# Altium PCB DeutschPCB.PcbDoc (part 1 of 2)
Units mil, origin at the board's own origin, x right, y up, seen from the top; angles counter-clockwise.
Board outline 2910 x 1625 mil, 2 copper layers (Top Layer, Bottom Layer), stack 61.8 mil thick; 103 components, 118 nets, 371 pads, 132 vias.
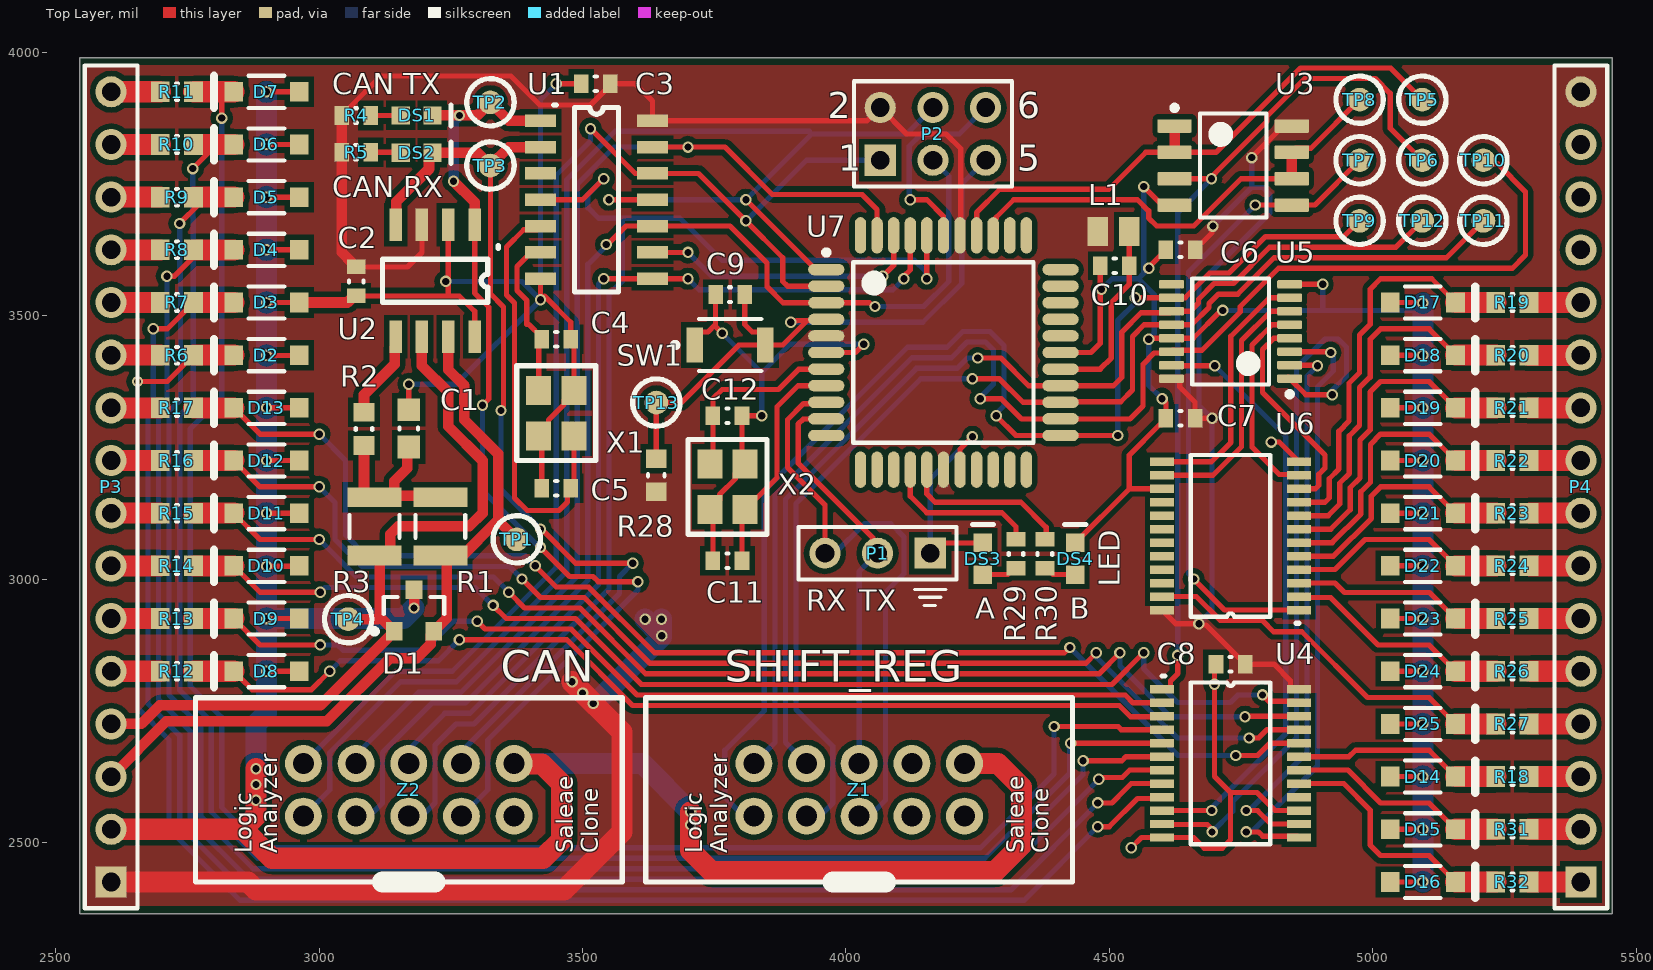
[diagram p0: Top Layer view]
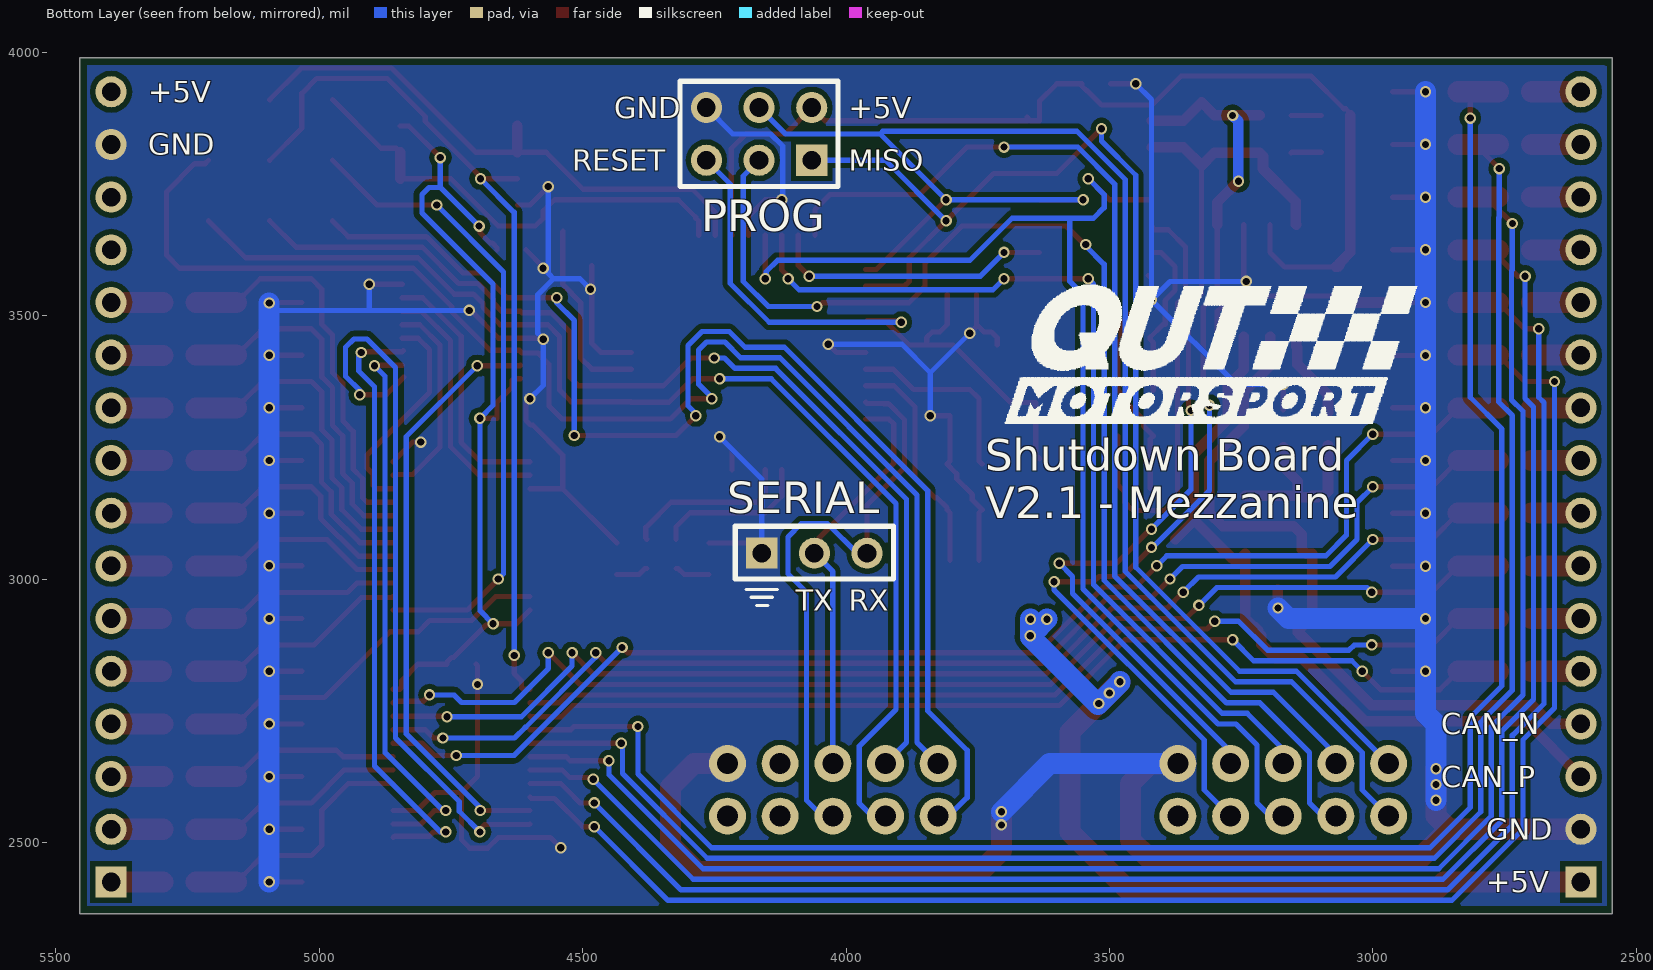
[diagram p1: Bottom Layer view, seen from below]

## Layer stack, top to bottom
Top Solder: solder mask 0.4, Solder Resist, Dk 3.5
Top Layer: signal copper 1.4
Dielectric 1: core 59, Core-043, Dk 4.3
Bottom Layer: signal copper 1.4
Bottom Solder: solder mask 0.4, Solder Resist, Dk 3.5

## Board outline
2545,2365 2545,3990 5455,3990 5455,2365

## Design rules (kind name [scope] priority, off if disabled: settings)
Clearance [All] p1: gap=10 ignorepadtopadclearanceinfootprint=FALSE except(0: Arc-Hole Track-Hole SMDPad-Hole THPad-Hole Via-Hole Fill-Hole Poly-Hole Region-Hole Text-Hole; 6: SMDPad-SMDPad)
PolygonConnect [All] p1: connectstyle=Direct reliefconductorwidth=10 reliefentries=4 polygonreliefangle="90 Angle" airgapwidth=10
RoutingVias [All] p1: holewidth=13.78 width=21.65 viastyle="Through Hole" minholewidth=13.78 minwidth=21.65 maxholewidth=13.78 maxwidth=21.65
SolderMaskExpansion [All] p1: expansion=4
Width [All] p1: maxlimit=40 minlimit=10 preferedwidth=20 minimp=50.000000 maximp=50.000000 favimp=50.000000
30 further rules are at their usual default settings.

## Classes and differential pairs
component class Master: P3 P4
component class MCU: C9 C10 C11 C12 DS3 DS4 L1 P1 P2 R28 R29 R30 SW1 TP9 TP10 TP11 TP12 TP13 U7 X2 Z1 Z2
component class Demux: C6 C7 C8 D2 D3 D4 D5 D6 D7 D8 D9 D10 D11 D12 D13 D14 D15 D16 D17 D18 D19 D20 D21 D22 D23 D24 D25 R6 R7 R8 R9 R10 R11 R12 R13 R14 R15 R16 R17 R18 R19 R20 R21 R22 R23 R24 R25 R26 R27 R31 R32 TP5 TP6 TP7 TP8 U3 U4 U5 U6
component class CANBUS: C1 C2 C3 C4 C5 D1 DS1 DS2 R1 R2 R3 R4 R5 TP1 TP2 TP3 TP4 U1 U2 X1

## Components (designator, comment, footprint, x,y, rotation, side; value= is the part's Value field where it differs from the comment)
C1 "CAP 4.7nF 50V 0603(1608)" CAPC0603(1608)100_M 3170,3285.98 r270 top value=4.7nF
C2 "CAP 100nF 50V 0603(1608)" CAPC0603(1608)100_L 3070,3565 r90 top value=100nF
C3 "CAP 100nF 50V 0603(1608)" CAPC0603(1608)100_L 3525,3940 r0 top value=100nF
C4 "CAP 18pF 50V 0603(1608)" CAPC0603(1608)100_L 3450,3455 r180 top value=18pF
C5 "CAP 18pF 50V 0603(1608)" CAPC0603(1608)100_L 3450,3172.44 r0 top value=18pF
C6 "CAP 100nF 50V 0603(1608)" CAPC0603(1608)100_L 4635,3625 r180 top value=100nF
C7 "CAP 100nF 50V 0603(1608)" CAPC0603(1608)100_L 4635,3305 r0 top value=100nF
C8 "CAP 100nF 50V 0603(1608)" CAPC0603(1608)100_L 4729.92,2838.5 r180 top value=100nF
C9 "CAP 100nF 50V 0603(1608)" CAPC0603(1608)100_L 3780,3540 r180 top value=100nF
C10 "CAP 100nF 50V 0603(1608)" CAPC0603(1608)100_L 4510,3595 r180 top value=100nF
C11 "CAP 18pF 50V 0603(1608)" CAPC0603(1608)100_L 3775,3035 r0 top value=18pF
C12 "CAP 18pF 50V 0603(1608)" CAPC0603(1608)100_L 3775,3310 r180 top value=18pF
D1 "NUP2105LT1G" ONSC-SOT-23-3-318-08_V 3180,2940 r90 top
D2 "BZT52C5V1-7-F" DIOD-SOD123_V 2899.84,3425 r180 top
D3 "BZT52C5V1-7-F" DIOD-SOD123_V 2899.84,3525 r180 top
D4 "BZT52C5V1-7-F" DIOD-SOD123_V 2899.84,3625 r180 top
D5 "BZT52C5V1-7-F" DIOD-SOD123_V 2899.84,3725 r180 top
D6 "BZT52C5V1-7-F" DIOD-SOD123_V 2899.84,3825 r180 top
D7 "BZT52C5V1-7-F" DIOD-SOD123_V 2899.84,3925 r180 top
D8 "BZT52C5V1-7-F" DIOD-SOD123_V 2899.84,2825 r180 top
D9 "BZT52C5V1-7-F" DIOD-SOD123_V 2899.84,2925 r180 top
D10 "BZT52C5V1-7-F" DIOD-SOD123_V 2899.84,3025 r180 top
D11 "BZT52C5V1-7-F" DIOD-SOD123_V 2899.84,3125 r180 top
D12 "BZT52C5V1-7-F" DIOD-SOD123_V 2899.84,3225 r180 top
D13 "BZT52C5V1-7-F" DIOD-SOD123_V 2899.84,3325 r180 top
D14 "BZT52C5V1-7-F" DIOD-SOD123_V 5095,2625 r0 top
D15 "BZT52C5V1-7-F" DIOD-SOD123_V 5095,2525 r0 top
D16 "BZT52C5V1-7-F" DIOD-SOD123_V 5095,2425 r0 top
D17 "BZT52C5V1-7-F" DIOD-SOD123_V 5095,3525 r0 top
D18 "BZT52C5V1-7-F" DIOD-SOD123_V 5095,3425 r0 top
D19 "BZT52C5V1-7-F" DIOD-SOD123_V 5095,3325 r0 top
D20 "BZT52C5V1-7-F" DIOD-SOD123_V 5095,3225 r0 top
D21 "BZT52C5V1-7-F" DIOD-SOD123_V 5095,3125 r0 top
D22 "BZT52C5V1-7-F" DIOD-SOD123_V 5095,3025 r0 top
D23 "BZT52C5V1-7-F" DIOD-SOD123_V 5095,2925 r0 top
D24 "BZT52C5V1-7-F" DIOD-SOD123_V 5095,2825 r0 top
D25 "BZT52C5V1-7-F" DIOD-SOD123_V 5095,2725 r0 top
DS1 "LED Blue 0603" "LED BLUE 0603" 3185,3880 r0 top
DS2 "LED Blue 0603" "LED BLUE 0603" 3185,3809.17 r0 top
DS3 "LED Orange 0603" "LED ORANGE 0603" 4260,3038.54 r90 top
DS4 "LED Orange 0603" "LED ORANGE 0603" 4435,3038.54 r90 top
L1 "LQM21FN100M70L" MURA-IND0805_L 4507.72,3660 r180 top
P1 "Header 3" HDR1X3 4160,3049.09 r180 top
P2 "Header 3X2" HDR2X3 4065,3795 r0 top
P3 "Header 16" HDR1X16 2605,2425 r90 top
P4 "Header 16" HDR1X16 5395,2425 r90 top
R1 "60R4 1% 1210(3225)" RESC1210(3225)_L 3230,3100 r270 top value="60.40 Ohm"
R2 "300R 5% 0603(1608)" RESC0603(1608)_N 3085,3285 r270 top value="300.00 Ohm"
R3 "60R4 1% 1210(3225)" RESC1210(3225)_L 3105,3100 r90 top value="60.40 Ohm"
R4 "1K 5% 0603(1608)" RESC0603(1608)_L 3070,3880 r180 top value="1000.00 Ohm"
R5 "1K 5% 0603(1608)" RESC0603(1608)_L 3070,3810 r180 top value="1000.00 Ohm"
R6 "10K" RESC0603(1608)_N 2730,3425 r0 top value="10000.00 Ohm"
R7 "10K" RESC0603(1608)_N 2730,3525 r0 top value="10000.00 Ohm"
R8 "10K" RESC0603(1608)_N 2730,3625 r0 top value="10000.00 Ohm"
R9 "10K" RESC0603(1608)_N 2730,3725 r0 top value="10000.00 Ohm"
R10 "10K" RESC0603(1608)_N 2730,3825 r0 top value="10000.00 Ohm"
R11 "10K" RESC0603(1608)_N 2730,3925 r0 top value="10000.00 Ohm"
R12 "10K" RESC0603(1608)_N 2730,2825 r0 top value="10000.00 Ohm"
R13 "10K" RESC0603(1608)_N 2730,2925 r0 top value="10000.00 Ohm"
R14 "10K" RESC0603(1608)_N 2730,3025 r0 top value="10000.00 Ohm"
R15 "10K" RESC0603(1608)_N 2730,3125 r0 top value="10000.00 Ohm"
R16 "10K" RESC0603(1608)_N 2730,3225 r0 top value="10000.00 Ohm"
R17 "10K" RESC0603(1608)_N 2730,3325 r0 top value="10000.00 Ohm"
R18 "10K" RESC0603(1608)_N 5265,2625 r180 top value="10000.00 Ohm"
R19 "10K" RESC0603(1608)_N 5265,3525 r180 top value="10000.00 Ohm"
R20 "10K" RESC0603(1608)_N 5265,3425 r180 top value="10000.00 Ohm"
R21 "10K" RESC0603(1608)_N 5265,3325 r180 top value="10000.00 Ohm"
R22 "10K" RESC0603(1608)_N 5265,3225 r180 top value="10000.00 Ohm"
R23 "10K" RESC0603(1608)_N 5265,3125 r180 top value="10000.00 Ohm"
R24 "10K" RESC0603(1608)_N 5265,3025 r180 top value="10000.00 Ohm"
R25 "10K" RESC0603(1608)_N 5265,2925 r180 top value="10000.00 Ohm"
R26 "10K" RESC0603(1608)_N 5265,2825 r180 top value="10000.00 Ohm"
R27 "10K" RESC0603(1608)_N 5265,2725 r180 top value="10000.00 Ohm"
R28 "10K 5% 0603(1608)" RESC0603(1608)_N 3640,3197.05 r270 top value="10000.00 Ohm"
R29 "1K 5% 0603(1608)" RESC0603(1608)_L 4322.64,3047.79 r90 top value="1000.00 Ohm"
R30 "1K 5% 0603(1608)" RESC0603(1608)_L 4377.64,3047.79 r90 top value="1000.00 Ohm"
R31 "10K" RESC0603(1608)_N 5265,2525 r180 top value="10000.00 Ohm"
R32 "10K" RESC0603(1608)_N 5265,2425 r180 top value="10000.00 Ohm"
SW1 "B3U-1000P" OMRON-B3U-1000_V 3780,3444.21 r0 top
TP1 "TestPoint_SMD" TestPointSMD 3375,3075.35 r90 top
TP2 "TestPoint_SMD" TestPointSMD 3325,3905 r90 top
TP3 "TestPoint_SMD" TestPointSMD 3325,3785 r90 top
TP4 "TestPoint_SMD" TestPointSMD 3055,2923.86 r90 top
TP5 "TestPoint_SMD" TestPointSMD 5093.98,3910 r0 top
TP6 "TestPoint_SMD" TestPointSMD 5093.98,3795 r0 top
TP7 "TestPoint_SMD" TestPointSMD 4975,3795 r0 top
TP8 "TestPoint_SMD" TestPointSMD 4975,3910 r0 top
TP9 "TestPoint_SMD" TestPointSMD 4975,3680 r90 top
TP10 "TestPoint_SMD" TestPointSMD 5210,3795 r90 top
TP11 "TestPoint_SMD" TestPointSMD 5210,3680 r90 top
TP12 "TestPoint_SMD" TestPointSMD 5093.98,3680 r90 top
TP13 "TestPoint_SMD" TestPointSMD 3640,3335 r90 top
U1 "MCP2518FD" "MCP2517FD SOIC" 3420,3870 r0 top
U2 "MCP2561" "MCP2561 SOIC" 3295,3672.6 r270 top
U3 "LM358AM" D0008A_M 4735,3785 r0 top
U4 "74HC4067" "74HC4067 TSSOP24" 4600,2790.87 r0 top
U5 "SN74HC595PWR" PW0016A_L 4730,3470 r180 top
U6 "74HC4067" "74HC4067 TSSOP24" 4859.84,2941.14 r180 top
U7 "ATmega1284P-AU" 44A_N 4185,3430 r0 top
X1 "XTAL_20Mz_3.2mm*2.5mm" 3.2mm*2.5mm 3450,3315 r270 top
X2 "XTAL_16Mz_3.2mm*2.5mm" 3.2mm*2.5mm 3775,3175 r90 top
Z1 "LogicAnalyzerBreakOut" LogicAnalyzer 4025,2599.85 r90 top
Z2 "LogicAnalyzerBreakOut" LogicAnalyzer 3170,2599.85 r90 top

## Footprints (in the part's own frame and the unit in brackets; to place one, negate y for a bottom-side part, rotate by r counter-clockwise, add the part's x,y. Pads: shape width x height; smd on the part's side, far side on the other; paste and mask are expansions set on the pad)
3.2mm*2.5mm [mm]
  rect 1.4x1.2 smd: 1(-1.1,-0.85) 2(1.1,-0.85) 3(1.1,0.85) 4(-1.1,0.85)
  silkscreen extent -2.29,-1.91 2.29,1.91, body extent -1.6,-1.25 1.6,1.25, height 0.8
44A_N [mm] "Thin QFP, 44-Leads, Body 10x10mm, Pitch 0.8mm, IPC Medium Density"
  oval 1.75x0.55 smd: 1(-5.65,4) 2(-5.65,3.2) 3(-5.65,2.4) 4(-5.65,1.6) 5(-5.65,0.8) 6(-5.65,0) 7(-5.65,-0.8) 8(-5.65,-1.6) 9(-5.65,-2.4) 10(-5.65,-3.2) 11(-5.65,-4) 23(5.65,-4) 24(5.65,-3.2) 25(5.65,-2.4) 26(5.65,-1.6) 27(5.65,-0.8) 28(5.65,0) 29(5.65,0.8) 30(5.65,1.6) 31(5.65,2.4) 32(5.65,3.2) 33(5.65,4)
  oval 0.55x1.75 smd: 12(-4,-5.65) 13(-3.2,-5.65) 14(-2.4,-5.65) 15(-1.6,-5.65) 16(-0.8,-5.65) 17(0,-5.65) 18(0.8,-5.65) 19(1.6,-5.65) 20(2.4,-5.65) 21(3.2,-5.65) 22(4,-5.65) 34(4,5.65) 35(3.2,5.65) 36(2.4,5.65) 37(1.6,5.65) 38(0.8,5.65) 39(0,5.65) 40(-0.8,5.65) 41(-1.6,5.65) 42(-2.4,5.65) 43(-3.2,5.65) 44(-4,5.65)
  silkscreen extent -5.77,-4.35 4.35,4.95, body extent -5,-5 5,5, height 1.2
"74HC4067 TSSOP24" [mil]
  rect 45x16 smd: 1(0,0) 2(0,-25.59) 3(0,-51.18) 4(0,-76.77) 5(0,-102.36) 6(0,-127.95) 7(0,-153.54) 8(0,-179.13) 9(0,-204.72) 10(0,-230.32) 11(0,-255.91) 12(0,-281.5) 13(259.84,-281.5) 14(259.84,-255.91) 15(259.84,-230.32) 16(259.84,-204.72) 17(259.84,-179.13) 18(259.84,-153.54) 19(259.84,-127.95) 20(259.84,-102.36) 21(259.84,-76.77) 22(259.84,-51.18) 23(259.84,-25.59) 24(259.84,0)
  silkscreen extent 0,-294 205,25, body extent 4,-295 256,12, height 41
CAPC0603(1608)100_L [mm] "Chip Capacitor, Body 1.6x0.8mm, Height 1.0mm, IPC High Density"
  rect 0.7x0.9 smd: 1(-0.7,0) 2(0.7,0)
  silkscreen extent -0.05,-0.35 0.05,0.35, body extent -0.87,-0.47 0.88,0.48, height 1
CAPC0603(1608)100_M [mm] "Chip Capacitor, Body 1.6x0.8mm, Height 1.0mm, IPC Low Density"
  rect 1.1x1.1 smd: 1(-0.9,0) 2(0.9,0)
  silkscreen extent -0.05,-0.45 0.05,0.45, body extent -0.87,-0.47 0.88,0.48, height 1
D0008A_M [mm] "SOIC, 8-Leads, Body 5x4mm, Pitch 1.27mm, IPC Low Density"
  rrect15% 1.65x0.65 smd: 1(-2.825,1.905) 2(-2.825,0.635) 3(-2.825,-0.635) 4(-2.825,-1.905) 5(2.825,-1.905) 6(2.825,-0.635) 7(2.825,0.635) 8(2.825,1.905)
  silkscreen extent -2.95,-2.5 1.6,2.9, body extent -3,-2.45 3,2.45, height 1.63
DIOD-SOD123_V [mm] "SMD, 2-Leads, Body 2.7x1.55mm"
  rect 0.9x0.95 smd: 1(-1.575,0) 2(1.575,0)
  silkscreen extent -0.86,-0.77 2.52,0.77, body extent -1.35,-0.77 1.35,0.77, height 1.41
HDR1X3 [mm] "Connector; Header; 3 Position"
  rect 1.5x1.5 hole 0.9: 1(0,0)
  round 1.5 hole 0.9: 2(2.54,0) 3(5.08,0)
  silkscreen extent -1.27,-1.27 6.35,1.27
HDR1X16 [mm] "Connector; Header; 16 Position"
  rect 1.5x1.5 hole 0.9: 1(0,0)
  round 1.5 hole 0.9: 2(2.54,0) 3(5.08,0) 4(7.62,0) 5(10.16,0) 6(12.7,0) 7(15.24,0) 8(17.78,0) 9(20.32,0) 10(22.86,0) 11(25.4,0) 12(27.94,0) 13(30.48,0) 14(33.02,0) 15(35.56,0) 16(38.1,0)
  silkscreen extent -1.27,-1.27 39.37,1.27
HDR2X3 [mm] "Connector; Header; 3x2 Position"
  rect 1.5x1.5 hole 0.9: 1(0,0)
  round 1.5 hole 0.9: 2(0,2.54) 3(2.54,0) 4(2.54,2.54) 5(5.08,0) 6(5.08,2.54)
  silkscreen extent -1.27,-1.27 6.35,3.81
"LED BLUE 0603" [mil]
  rect 35x35 smd: 1(-30,0) 2(30,0)
  silkscreen extent 65,-20 65,20, body extent -40,-20 40,20, height 30
"LED ORANGE 0603" [mil]
  rect 35x35 smd: 1(-30,0) 2(30,0)
  silkscreen extent 65,-20 65,20, body extent -40,-20 40,20, height 30
LogicAnalyzer [mil]
  round 70 hole 40: 1(-50,200) 2(50,200) 3(-50,100) 4(50,100) 5(-50,0) 6(50,0) 7(-50,-100) 8(50,-100) 9(-50,-200) 10(50,-200)
  silkscreen extent -175,-405 175,405, body extent -175,-404 175,404, height 359
"MCP2517FD SOIC" [mm]
  rect 1.5x0.6 smd: 1(0,0) 2(0,-1.27) 3(0,-2.54) 4(0,-3.81) 5(0,-5.08) 6(0,-6.35) 7(0,-7.62) 8(5.4,-7.62) 9(5.4,-6.35) 10(5.4,-5.08) 11(5.4,-3.81) 12(5.4,-2.54) 13(5.4,-1.27) 14(5.4,0)
  silkscreen extent 0.64,-8.25 3.76,0.76, body extent 0.74,-8.13 4.64,0.52, height 1.74
"MCP2561 SOIC" [mm]
  rect 1.55x0.6 smd: 1(0,0) 2(0,-1.27) 3(0,-2.54) 4(0,-3.81) 5(5.4,-3.81) 6(5.4,-2.54) 7(5.4,-1.27) 8(5.4,0)
  silkscreen extent 1.02,-4.44 3.74,1.14, body extent 0.51,-4.38 4.64,0.52, height 1.65
MURA-IND0805_L [mm] "Chip Inductor, 2-Leads, Body 2.2x1.45mm, IPC High Density"
  rect 0.99x1.39 smd: 1(-0.755,0) 2(0.755,0)
  body extent -1.1,-0.72 1.1,0.72, height 1.45
OMRON-B3U-1000_V [mm] "SMD, 2-Leads, Body 3x2.5mm"
  rect 0.8x1.7 smd: 1(-1.7,0) 2(1.7,0)
  silkscreen extent -2.77,-1.25 1.5,1.25, body extent -1.5,-1.25 1.5,1.25, height 1.75
ONSC-SOT-23-3-318-08_V [mm] "SOT23, 3-Leads, Body 2.92x1.3mm, Pitch 0.95mm"
  rect 0.9x0.8 smd: 1(-1,0.95) 2(-1,-0.95) 3(1,0)
  silkscreen extent -1.12,-1.46 0.65,2.02, body extent -0.65,-1.46 0.65,1.46, height 1.11
PW0016A_L [mm] "SOP, 16-Leads, Body 5.1x4.5mm, Pitch 0.65mm, IPC High Density"
  rrect25% 1.2x0.4 smd: 1(-2.85,2.275) 2(-2.85,1.625) 3(-2.85,0.975) 4(-2.85,0.325) 5(-2.85,-0.325) 6(-2.85,-0.975) 7(-2.85,-1.625) 8(-2.85,-2.275) 9(2.85,-2.275) 10(2.85,-1.625) 11(2.85,-0.975) 12(2.85,-0.325) 13(2.85,0.325) 14(2.85,0.975) 15(2.85,1.625) 16(2.85,2.275)
  silkscreen extent -2.98,-2.55 1.85,3.15, body extent -3.21,-2.5 3.21,2.5, height 1
RESC0603(1608)_L [mm] "Chip Resistor, Body 1.6x0.8mm, IPC High Density"
  rect 0.7x0.9 smd: 1(-0.7,0) 2(0.7,0)
  silkscreen extent -0.05,-0.35 0.05,0.35, body extent -0.85,-0.47 0.85,0.47, height 0.6
RESC0603(1608)_N [mm] "Chip Resistor, Body 1.6x0.8mm, IPC Medium Density"
  rect 0.9x1 smd: 1(-0.8,0) 2(0.8,0)
  silkscreen extent -0.05,-0.4 0.05,0.4, body extent -0.85,-0.47 0.85,0.47, height 0.6
RESC1210(3225)_L [mm] "Chip Resistor, Body 3.2x2.5mm, IPC High Density"
  rect 0.95x2.6 smd: 1(-1.4,0) 2(1.4,0)
  silkscreen extent -0.55,-1.2 0.55,1.2, body extent -1.7,-1.35 1.7,1.35, height 0.71
TestPointSMD [mil]
  round 45 smd: 1(0,0)
  silkscreen extent -45,-45 45,45

## Part data
C1: library part CMP-1035-02202-1, "CAP 4.7nF 50V ±5% 0603 (1608 Metric) Thickness 1mm SMD", Case-EIA=0603, Case-Metric=1608, Rated Voltage="50 V", Tolerance=±5%, Max Thickness="1 mm", Technology=SMT
C2 C3 C6 C7 C8 C9 C10: library part CMP-1035-02591-1, "CAP 100nF 50V ±5% 0603 (1608 Metric) Thickness 1mm SMD", Case-EIA=0603, Case-Metric=1608, Rated Voltage="50 V", Tolerance=±5%, Max Thickness="1 mm", Technology=SMT
C4 C5 C11 C12: library part CMP-1035-00748-1, "CAP 18pF 50V ±1% 0603 (1608 Metric) Thickness 1mm SMD", Case-EIA=0603, Case-Metric=1608, Rated Voltage="50 V", Tolerance=±1%, Max Thickness="1 mm", Technology=SMT
D1: library part CMP-1063-00164-1, "Dual Line CAN Bus Protector, 3-Pin SOT-23, Pb-Free, Tape and Reel", Manufacturer="On Semiconductor", C Max (pF)=30, ComponentLink1Description="Manufacturer URL", ComponentLink1URL=http://www.onsemi.com/, ComponentLink2Description=Datasheet, ComponentLink2URL=http://www.onsemi.cn/pub_link/Collateral/NUP2105L-D.PDF, ComponentLink3Description="Package Specification", ComponentLink3URL=http://www.onsemi.cn/pub_link/Collateral/318-08.PDF, DatasheetVersion="Rev. 5", Direction=Bidirectional, IR Max (uA)=0.1, Mounting Technology="Surface Mount", Number of Lines=2, PackageDescription="3-Pin Small Outline Transistor, Body 2.92 x 1.3 mm, Pitch 0.95 mm", PackageReference=SOT-23-3-318-08, PackageVersion="Rev. AP, 11/2009", Packing="Tape and Reel", PartNumber=NUP2105LT1G, PPK Max (W)=350, RoHS=Pb-Free, V(BR) Min (V)=26.2
D2 D3 D4 D5 D6 D7 D8 D9 D10 D11 D12 D13 D14 D15 D16 D17 D18 D19 D20 D21 D22 D23 D24 D25: library part CMP-2000-05976-1, "Surface Mount Zener Diode, 5.1 V, -65 to 150 degC, 2-Pin SMD (SOD-123), RoHS, Tape and Reel", Ir - Reverse Current=2uA, Manufacturer=DiodesIncorporated, Maximum Operating Temperature=+150C, Minimum Operating Temperature=-65C, Package / Case=SOD-123, Package Description="2-Pin Surface Mount Device, Body 2.7 x 1.55 mm", Package Reference=SOD123, Pd - Power Dissipation=500mW, Voltage Temperature Coefficient=-0.75mV/C, Voltage Tolerance=6%, Vz - Zener Voltage=5.1V, Zener Current=5mA, Brand=DiodesIncorporated, Configuration=Single, Datasheet URL=http://www.diodes.com/_files/datasheets/ds18004.pdf, Datasheet Version="Rev. 37-2, 09/2012", Factory Pack Quantity=3000, Height=1.35mm, Length=2.85mm, Manufacturer URL=http://www.diodes.com/, Mounting Style=SMD/SMT, Mounting Technology=SurfaceMount, Packaging=Reel, Product Category=ZenerDiodes, RoHS=True, Series=BZT52C5, Termination Style=SMD/SMT, Unit Weight=0.000353oz, Width=1.7mm, Zz - Zener Impedance=60Ohms
DS1 DS2: library part "LED BLUE 0603"
DS3 DS4: library part "LED ORANGE 0603"
L1: library part CMP-2000-06587-1, "Fixed Inductor, 10 uH, +/-20%, -55 to 125 degC, 2-Pin SMD (0805), RoHS, Tape and Reel", Case Size/Dimension=0805, DC Resistance=0.6, Inductance-Nom=10H, Manufacturer=Murata, Package Description="2-Pin Surface Mount Device, Body 2 x 1.25 mm", Package Reference=IND0805, Rated Current-Max=100mA, Tolerance (%)=20%, Datasheet URL=http://psearch.en.murata.com/inductor/product/LQM21FN100M70%23.pdf, Datasheet Version=05/2016, Manufacturer URL=http://www.murata.com/, Mounting Technology=SurfaceMount
P1: "Header, 3-Pin", LatestRevisionDate=17-Jul-2002, LatestRevisionNote="Re-released for DXP Platform.", Publisher="Altium Limited"
P2: "Header, 3-Pin, Dual row", LatestRevisionDate=17-Jul-2002, LatestRevisionNote="Re-released for DXP Platform.", Publisher="Altium Limited"
P3 P4: "Header, 16-Pin", LatestRevisionDate=17-Jul-2002, LatestRevisionNote="Re-released for DXP Platform.", Publisher="Altium Limited"
R1 R3: library part CMP-1015-00372-1, "60R4 0.5W 1% 1210 (3225 Metric)  SMD", Case-EIA=1210, Case-Metric=3225, Power="0.5 W", Tolerance="1 %", Technology=SMT
R2: library part CMP-1012-00061-1, "300R 0.1W 5% 0603 (1608 Metric)  SMD", Case-EIA=0603, Case-Metric=1608, Power="0.1 W", Tolerance="5 %", Technology=SMT
R4 R5 R29 R30: library part CMP-1012-00074-1, "1K 0.1W 5% 0603 (1608 Metric)  SMD", Case-EIA=0603, Case-Metric=1608, Power="0.1 W", Tolerance="5 %", Technology=SMT
R6 R7 R8 R9 R10 R11 R12 R13 R14 R15 R16 R17 R18 R19 R20 R21 R22 R23 R24 R25 R26 R27 R28 R31 R32: library part CMP-1012-00098-1, "10K 0.1W 5% 0603 (1608 Metric)  SMD", Case-EIA=0603, Case-Metric=1608, Power="0.1 W", Tolerance="5 %", Technology=SMT
SW1: library part CMP-2100-03586-1, "Ultra-Small Tactile Switch, 0.05 A, 12 V, -25 to 70 degC, 2-Pin SMD, RoHS, Tape and Reel", Case/Package=SMD/SMT, Contact Current Rating=50mA, Insulation Resistance=100MOhm, Manufacturer="Omron Electronic Components", Max Operating Temperature=70degC, Min Operating Temperature=-25degC, Operating Force=1.5N, Package Description="2-Pin Surface Mount Device, Body 3 x 2.5 mm", Package Quantity=1, Package Reference=B3U-1000, Voltage Rating (DC)=12V, Actuator Length=0.4mm, Contact Material=Silver, Current Rating=50mA, Datasheet URL=http://www.omron.com/ecb/products/pdf/en-b3u.pdf, Datasheet Version=42005.0, Depth=2.5mm, Electrical Life=200000Cycles, Height=1.2mm, Illumination Type=Illuminated, Lead Free=LeadFree, Length=4mm, Manufacturer URL=http://www.omron.com/, Max Current Rating=50mA, Mount=SurfaceMount, Orientation=Straight, Packaging=TapeandReel, REACH SVHC=Unknown, RoHSCompliant=true, Switch Travel=0.15mm, Termination=SMD/SMT, Throw Configuration=SPST, Weight=0.022g, Width=3mm
U3: library part CMP-0055-00796-3, "Low Power Dual Operational Amplifier, 8-pin Narrow SOIC", Manufacturer="Texas Instruments", Package Reference=D0008A, PackageTopMarking=NSZXTT*LM*358AM, PowerWise=N, Code_IPC=SOIC127P600-8, Code_JEDEC=MS-012-AA, ComponentLink1Description="Datasheet URL", ComponentLink1URL=http://www.ti.com/general/docs/lit/getliterature.tsp?genericPartNumber=LM358-N&fileType=pdf, CompType=Amplifiers, PackageDescription="SOIC Narrow, 4.9 x 3.9 x 1.45mm, 8 Lead, 1.27mm Pitch", PinCount=8, RoHS=N
U5: library part CMP-0780-00192-3, "8-Bit Shift Registers With 3-State Output Registers, PW0016A, LARGE T&R", F @ Nom Voltage(Max)(Mhz)=28, Generic Part Number=SN74HC595, ICC @ Nom Voltage(Max)(mA)=0.08, Manufacturer="Texas Instruments", Operating Temperature Range(C)="-40 to 85", Rating=Military, tpd @ Nom Voltage(Max)(ns)=34, Voltage(Nom)(V)=6, 3-State Output=Yes, Bits=8, Code_JEDEC=MO-153, DatasheetVersion=SCLS041H, Input Type=CMOS, Output Drive (IOL/IOH)(Max)(mA)=7.8/-7.8, Output Type=CMOS, PackageReference=PW0016A, PackageVersion=http://www.ti.com/lit/ml/mpds361/mpds361.pdf, Technology Family=HC, VCC(Max)(V)=6, VCC(Min)(V)=2
U7: library part CMP-0095-00577-1, "8-bit AVR Microcontroller, 128KB Flash, 4KB EEPROM, 16KB SRAM, 44-pin TQFP, Industrial Grade (-40°C to 85°C)", Code_JEDEC=MS-026-ACB, ComponentLink1Description="Manufacturer URL", ComponentLink1URL=http://www.atmel.com/, ComponentLink2Description="ATmega164A/164PA/324A/324PA/644A/644PA/1284/1284P Datasheet", ComponentLink2URL=http://www.atmel.com/dyn/resources/prod_documents/doc8272.pdf, ComponentLink3Description="ATmega164A/164PA/324A/324PA/644A/644PA/1284/1284P Summary", ComponentLink3URL=http://www.atmel.com/dyn/resources/prod_documents/8272S.pdf, DatasheetVersion="revC, Jun-2011", PackageDescription="44-Pin Plastic Thin Profile Quad Flat Pack, 10 x 10 x 1.0 mm Body, 0.8 mm Pitch (TQFP)", PackageReference=44A, PackageVersion="revC, Oct-2010"
Z1 Z2: library part LogicAnalyer
  Z1: ComponentLink1Description=LCSC, ComponentLink1URL=https://lcsc.com/product-detail/IDC-Connectors_BOOMELE-Boom-Precision-Elec-C5665_C5665.html
X1: ComponentLink1Description=LCSC, ComponentLink1URL=https://lcsc.com/product-detail/SMD-Crystal-Resonators_Yangxing-Tech-X322520MSB4SI_C9004.html
X2: ComponentLink1Description=LCSC, ComponentLink1URL=https://lcsc.com/product-detail/SMD-Crystal-Resonators_Yangxing-Tech-X322516MOB4SI_C12668.html

## Via types
v1: diameter 21.65, hole 13.78, Top Layer to Bottom Layer, tented both sides, 132 vias

## Nets (pads, with @x,y where several pads share a name; then routed paths per layer and width w, separated by ;. In a path a pad name is that pad's centre, name@x,y a point inside that pad or via, vN(x,y) a via of type N, cw(c..) or ccw(c..) an arc to the next point about the centre after c; other vN are vias at no path point)
+5: C2.2 C3.2 C6.1 C7.2 C8.1 L1.2 P2.2 P3.1 P4.16 R4.2 R5.2 R28.2 U1.14 U2.3 U3.8 U4.24 U5.16 U6.24 U7.5 U7.17 U7.38 | length 5415.3
  Top Layer w10: R4.2 3042.44,3883.94 3051.22,3892.72 3055.16,3892.72 3117.44,3955 3363.66,3955 3418.66,3900 3515,3900 3542.28,3927.28 3543.78,3927.28 3552.56,3936.06 C3.2 3600,3940 3632.6,3907.4 U1.14 3649.2,3870 3656.01,3876.81 3656.01,3870 4040,3870 P2.2 4115,3845 4190,3845 4217.91,3817.09 4217.91,3652.44 U7.38 ; C2.2 3167.56,3592.56 3195,3620 U2.3 ; U6.24 4626.14,2915 v1(4670,2915) 4672.23,2912.77 4683.21,2912.77 4744.76,2851.22 4748.7,2851.22 4757.48,2842.44 C8.1 4812.2,2838.5 4843.99,2806.72 4843.99,2793.87 4846.99,2790.87 U4.24 ; U5.16 4630.7,3380.43 4633.57,3377.56 4633.57,3364.66 4662.56,3335.67 C7.2 v1(4695,3305) ; C6.1 4662.56,3628.94 4671.34,3637.72 4675.28,3637.72 4694.36,3656.8 4694.36,3667.77 v1(4696.59,3670) ; v1(4770,3800) 4830,3860 U3.8
  Top Layer w20: R4.2 R5.2 3042.44,3620.12 3062.28,3600.28 3062.28,3596.34 3066.06,3592.56 C2.2
  Top Layer w40: P3.1 2865,2425 2880,2410 3465,2410 3575,2520 3575,2710 v1(3480,2805)
  Bottom Layer w10: v1(4670,2915) 4695,2940 v1(4695,3305) 4670,3330 4670,3560 4805,3695 4805,3730 4791.59,3743.41 4770,3743.41 ; v1(4696.59,3670) 4770,3743.41 ; v1(4770,3800) 4770,3743.41
  Bottom Layer w40: v1(3480,2805) 3480,2803.7 v1(3500,2783.7) v1(3520,2763.7) 3521.85,2761.85 v1@3650,2890 ; v1(3618.58,2923.86) 3634.15,2908.29 3638.58,2903.86 ; v1(3649.72,2923.86) v1@3649.72,2915 ; 3638.58,2903.86 v1@3649.72,2915 ; 3638.58,2903.86 v1@3649.72,2892.72 ; v1@3649.72,2892.72 v1@3649.72,2915 ; v1@3649.72,2892.72 3649.72,2890.28 v1@3650,2890 ; v1@3649.72,2892.72 v1(3650,2892.44) v1@3650,2890
CAN_CS: U1.13 U7.43 Z2.4 | length 2118.6
  Top Layer w10: U1.13 v1(3700,3820) 3770,3820 3860,3730 4030.61,3730 4059.02,3701.6 U7.43
  Bottom Layer w10: Z2.4@3070,2625 3085,2625 3085,2681.57 3188.43,2785 3269.08,2785 3490,3005.92 3490,3750 3560,3820 v1(3700,3820)
CAN_CTRL_CLKO: U1.3
CAN_INT: U1.4 U7.40 Z2.5 | length 2340.2
  Top Layer w10: U1.4 3500,3720 v1(3540,3760) ; v1(4153.5,3570) U7.40
  Bottom Layer w10: Z2.5@3170,2525 3220,2575 3220,2685 3260,2725 3293.93,2725 3550,2981.07 3550,3540 3575,3565 3575,3685 ; v1(3540,3760) 3510,3730 3510,3705 3530,3685 3575,3685 ; v1(4153.5,3570) 4151.27,3572.23 4151.27,3583.73 4130,3605 3765,3605 3685,3685 3575,3685
CAN_INT0: U1.9 U7.42 | length 542
  Top Layer w10: U1.9 v1(3700,3620) ; v1(4070,3575) 4090.51,3595.51 U7.42
  Bottom Layer w10: v1(3700,3620) 3745,3575 v1(4070,3575)
CAN_INT1: U1.8 U7.41 Z2.6 | length 1794.8
  Top Layer w10: v1(3540,3570) U1.8 v1(3700,3570) ; v1(4110,3570) 4110,3575 4122.01,3587.01 U7.41
  Bottom Layer w10: Z2.6@3164.44,2654.44 3164.44,2671.15 3238.28,2745 3285.65,2745 3530,2989.35 3530,3560 v1(3540,3570) ; Z2.6@3185,2635 Z2.6@3200,2650 ; v1(3700,3570) 3720.83,3549.17 4089.17,3549.17 v1(4110,3570)
CAN_N: D1.1 P3.4 R3.1 TP4.1 U2.6 | length 1459.3
  Top Layer w20: P3.4 2662.57,2725 2697.57,2760 3001.97,2760 3134.88,2892.91 3136.85,2892.91 3142.6,2898.66 D1.1 3142.6,2902.6 3136.85,2908.35 3134.88,2908.35 3115,2928.23 ; TP4.1 3110.63,2923.86 3115,2928.23 ; U2.6 3195,3405 3245,3355 3245,3290 3310,3225 3310,3125 3285,3100 3150,3100 3134.9,3084.9 3134.9,3056.61 3126.2,3047.91 3115,3047.91 3115,2928.23
CAN_P: D1.2 P3.3 R1.2 TP1.1 U2.7 | length 1466.5
  Top Layer w20: P3.3 2710,2730 3014.39,2730 3134.39,2850 3185,2850 3211.65,2876.65 3211.65,2892.91 3217.4,2898.66 D1.2 3217.4,2902.6 3223.15,2908.35 3225.12,2908.35 3242.4,2925.63 3242.4,3047.91 3251.53,3038.79 3266.21,3038.79 3340,3112.57 ; U2.7 3245,3397.43 3275,3367.43 3275,3302.43 3340,3237.43 3340,3112.57 ; TP1.1 3340,3110.35 3340,3112.57
CAN_RX: DS2.2 TP3.1 U1.2 U2.4 Z2.8 | length 1846.4
  Top Layer w10: TP3.1 3325,3541.48 3350,3516.48 3350,3328.7 v1@3341.3,3320 ; v1@3420.92,3095.6 3486.52,3030 v1(3595,3030)
  Top Layer w20: U2.4 3146.17,3673.77 3146.17,3716.17 3208.37,3778.37 3208.37,3802.55 DS2.2 3300.78,3809.17 TP3.1 ; TP3.1 3360,3820 U1.2
  Bottom Layer w10: Z2.8 3270,2672.78 3570,2972.78 3570,3005 v1(3595,3030) ; v1(3345,3320) 3345,3169.69 v1(3420,3094.69)
CAN_RX_LED: DS2.1 R5.1 | length 57.8
  Top Layer w10: R5.1 3154.17,3810 DS2.1
CAN_SPLIT: C1.2 R1.1 R2.2 R3.2 | length 351.5
  Top Layer w20: R2.2 3085,3166.85 3093.7,3158.15 R3.2@3115,3158.15 ; R3.2 R3.2@3141.15,3155.12 ; R3.2@3142.45,3158.15 3142.45,3185.6 3167.46,3210.61 3167.46,3248.01 C1.2 ; R3.2@3151.15,3158.15 R1.1@3242.4,3158.15
CAN_SPLIT_R: R2.1 U2.5 | length 168.4
  Top Layer w20: R2.1 3085,3350 3143.19,3408.19 3143.19,3439.49 3145,3441.3 U2.5
CAN_TX: DS1.2 TP2.1 U1.1 U2.1 Z2.7 | length 1929.5
  Top Layer w10: U2.1 3295,3543.2 3321.81,3516.39 3321.81,3341.81 v1(3310,3330) ; v1(3420,3060) 3475,3005 3519.71,3005 3529.71,2995 v1(3605,2995)
  Top Layer w20: DS1.2 v1(3266.21,3880) 3300,3880 TP2.1 3360,3870 U1.1 ; v1(3255,3755) 3295,3715 U2.1
  Bottom Layer w10: Z2.7 3320,2599.85 3320,2694.5 3605,2979.5 v1(3605,2995) ; v1(3310,3330) 3310,3168.16 3418.16,3060 v1(3420,3060)
  Bottom Layer w20: v1(3255,3755) 3255,3868.79 v1(3266.21,3880)
CAN_TX_LED: DS1.1 R4.1 | length 57.4
  Top Layer w10: R4.1 DS1.1
CAN_X1_20MHz: C4.2 U1.6 X1.1 | length 314.7
  Top Layer w10: X1.1 3416.54,3449.09 C4.2 3422.44,3458.94 3398.11,3483.27 3394.17,3483.27 3394.17,3528.88 3375.47,3547.58 3375.47,3593.19 3402.28,3620 U1.6
CAN_X2_20MHz: C5.2 U1.5 X1.3 | length 811.2
  Top Layer w10: U1.5 3413.19,3663.19 3388.19,3663.19 3355.47,3630.47 3355.47,3539.29 3370.83,3523.94 3370.83,3154.17 3395,3130 3455,3130 3471.15,3146.15 3471.15,3166.03 C5.2 3483.46,3178.35 X1.3
GND: C1.1 C2.1 C3.1 C4.1 C5.1 C6.2 C7.1 C8.2 C9.2 C10.2 C11.1 C12.1 D1.3 D2.1 D3.1 D4.1 D5.1 D6.1 D7.1 D8.1 D9.1 D10.1 D11.1 D12.1 D13.1 D14.1 D15.1 D16.1 D17.1 D18.1 D19.1 D20.1 D21.1 D22.1 D23.1 D24.1 D25.1 DS3.2 DS4.2 P1.1 P2.6 P3.2 P4.15 SW1.1 U1.7 U2.2 U2.8 U3.4 U4.12 U4.15 U5.8 U5.13 U6.12 U6.15 U7.6 U7.18 U7.28 U7.39 X1.2 X1.4 X2.2 X2.4 Z1.10 Z2.10 | length 13384.7
  Top Layer w10: v1(2900,2825) D8.1 ; v1(2900,2925) D9.1 ; v1(2900,3024.09) D10.1@2961.85,3024.09 ; v1(2900,3125) D11.1 ; v1(2900,3225) D12.1 ; v1(2900,3325) D13.1 ; v1(2900,3424.49) D2.1@2961.85,3424.49 ; v1(2900,3525) D3.1 ; v1(2900,3625) D4.1 ; v1(2900,3725) D5.1 ; v1(2900,3825) D6.1 ; v1(2900,3925) D7.1 ; C2.1 3245,3537.44 ; C1.1 v1(3170,3370) ; v1(3240,3565) v1@3245,3560 ; U2.2 v1@3245,3560 ; U2.8 3295,3508.39 3265.94,3537.44 3245,3537.44 ; v1(3420,3530) U1.7 U1.7@3426.28,3576.28 ; C5.1 3422.44,3265.79 X1.2 3435.16,3290.32 3435.16,3301.65 3464.84,3331.34 3464.84,3339.68 X1.4 3483.46,3449.09 C4.1 3477.56,3487.44 v1@3427.5,3537.5 ; v1(3450,3940) C3.1 ; SW1.1 3713.07,3458.36 3723.82,3469.1 3737.96,3469.1 3752.44,3483.58 ; C11.1 3747.44,3125.79 X2.4 3760.16,3150.32 3760.16,3160.16 3789.84,3189.84 3789.84,3199.68 X2.2 3802.56,3224.21 C12.1 v1(3840,3310) ; C9.2 3752.44,3483.58 ; v1(3765,3466.68) 3752.44,3479.24 3752.44,3483.58 ; U7.6 4017.91,3430 v1(4033.77,3445.85) ; v1(4122.01,3720) 4153.48,3720 4185,3688.48 U7.39 ; P1.1 4179.45,3068.54 DS3.2 ; U7.18 4216.5,3246.5 v1(4240,3270) ; U7.28 4465,3430 4482.44,3447.44 4482.44,3539.2 4482.77,3539.53 4482.77,3552.23 4482.44,3552.56 C10.2 ; DS4.2 4537.91,3171.46 ; v1(4541.38,2490) 4560.75,2509.37 U4.12 4659.93,2509.37 4680.13,2489.17 4714.17,2489.17 4730,2505 4730,2595 ; v1(4565,3745) 4600,3710 U3.4 ; v1(4574.58,3455) 4576.79,3457.2 U5.13 4659.13,3457.2 4710.57,3508.65 4713.65,3508.65 v1(4715,3510) ; v1(4575,3590) 4575,3592.56 C6.2 ; U6.15 4537.91,3171.46 ; v1(4600,3342.44) 4607.44,3335 C7.1 4607.44,3301.06 4598.66,3292.28 4594.72,3292.28 4537.91,3235.47 4537.91,3171.46 ; C8.2 4699.51,2835.65 v1(4699.51,2800) 4699.51,2625.49 4730,2595 ; v1@4802.5,3260 v1(4807.07,3260) 4822.48,3260 U6.12 ; U5.8 4904.96,3559.57 v1(4905,3559.53) ; U4.15 4814.45,2560.55 4780,2595 4730,2595 ; D16.1 v1(5095,2425) ; D15.1 v1(5095,2525) ; D14.1 v1(5095,2625) ; D25.1 v1(5095,2725) ; D24.1 v1(5095,2825) ; D23.1 v1(5095,2925) ; D22.1 v1(5095,3025) ; D21.1 v1(5095,3125) ; D20.1 v1(5095,3225) ; D19.1 v1(5095,3325) ; D18.1 v1(5095,3425) ; D17.1 5093.98,3525 v1(5095,3523.98) ; 3245,3537.44 v1@3245,3560
  Top Layer w20: D3.1 3053.62,3525 3066.06,3537.44 C2.1 ; v1(3180,2945) D1.3
  Top Layer w40: P3.2 2855,2525 ; v1(2880,2640) v1(2880,2610) v1(2880,2580) 2880,2550 2855,2525 ; Z2.10 3371.24,2648.62 3423.11,2648.62 3460,2611.73 3460,2505 3425,2470 2910,2470 2855,2525 ; v1(3705,2558.14) v1(3705,2533.28) 3705,2485 3745,2445 4282.68,2445 4332.99,2495.31 4332.99,2605.33 4288.47,2649.85 Z1.10
  Bottom Layer w10: v1(3170,3370) 3260,3370 v1(3420,3530) ; v1(3240,3565) 3385,3565 v1(3420,3530) ; v1(3450,3940) 3420,3910 v1(3420,3530) ; v1(3765,3466.68) 3840,3391.68 ; v1(3840,3310) 3840,3391.68 ; v1(4033.77,3445.85) 3894.17,3445.85 3840,3391.68 ; v1(4122.01,3720) 4120,3722.01 4120,3821.72 4143.28,3845 4215,3845 P2.6 ; P1.1 4160,3190 v1(4240,3270) ; v1(4485,3550) 4505,3570 4555,3570 ; v1(4565,3745) 4565,3580 4555,3570 ; v1(4600,3342.44) 4574.58,3367.86 v1(4574.58,3455) 4574.58,3456.27 4585,3466.68 4585,3540 4555,3570 ; v1(4715,3510) 4905,3510 ; v1(4905,3559.53) 4905,3510 ; v1(5095,3523.98) 5081.02,3510 4905,3510
  Bottom Layer w40: v1(2880,2580) v1(2880,2610) v1(2880,2640) 2880,2725 2900,2745 v1(2900,2825) v1(2900,2925) ; v1(2900,3925) v1(2900,3825) v1(2900,3725) v1(2900,3625) v1(2900,3525) v1(2900,3424.49) v1(2900,3325) v1(2900,3225) v1(2900,3125) v1(2900,3024.09) v1(2900,2925) ; v1(3180,2945) 3160,2925 v1(2900,2925) ; Z2.10 3613.28,2649.85 v1(3705,2558.14) ; v1(5095,2425) v1(5095,2525) v1(5095,2625) v1(5095,2725) v1(5095,2825) v1(5095,2925) v1(5095,3025) v1(5095,3125) v1(5095,3225) v1(5095,3325) v1(5095,3425) v1(5095,3523.98)
MCU_AREF: U7.29
MCU_AVCC: C10.1 L1.1 U7.27 | length 359.4
  Top Layer w10: U7.27 4482.52,3398.5 4503.66,3419.65 4503.66,3525.19 4537.56,3559.08 C10.1 4537.56,3659.88 L1.1
MCU_CLK: P2.3 U1.10 U7.3 Z2.3 | length 2359.8
  Top Layer w10: v1(3545,3635) 3547.56,3635 3582.56,3670 U1.10 3780,3670 3850,3600 3850,3555 3880.51,3524.49 U7.3 4044.75,3524.49 4051.85,3517.39 v1(4055,3517.39)
  Bottom Layer w10: Z2.3@3070,2525 3120,2575 3120,2670.56 3214.44,2765 3277.36,2765 3510,2997.63 3510,3597.44 3545,3632.44 v1(3545,3635) ; v1(4055,3517.39) 4147.39,3517.39 4195,3565 4195,3765 P2.3
MCU_LED_A: R29.2 U7.15 | length 298.8
  Top Layer w10: U7.15 4122.01,3157.34 4153.48,3125.87 4295.92,3125.87 4322.64,3099.15 R29.2
MCU_LED_A_LED: DS3.1 R29.1 | length 67.5
  Top Layer w10: DS3.1 4307.01,3008.54 4318.7,3020.23 R29.1
MCU_LED_B: R30.2 U7.16 | length 322.6
  Top Layer w10: U7.16 4153.5,3161.55 4169.19,3145.87 4332.32,3145.87 4380,3098.18 4380,3077.71 R30.2
MCU_LED_B_LED: DS4.1 R30.1 | length 62.2
  Top Layer w10: R30.1 4381.57,3020.23 4393.27,3008.54 DS4.1
MCU_MISO: P2.1 U1.12 U7.2 Z2.2 | length 2394.2
  Top Layer w10: v1(3515,3855) 3600,3770 U1.12 3719.94,3770 v1(3810,3679.94) 3880,3609.94 3880,3565 3889.02,3555.98 U7.2
  Bottom Layer w10: Z2.2@2969.93,2649.93 3145,2825 3252.51,2825 3450,3022.49 3450,3766.57 3515,3831.57 v1(3515,3855) ; v1(3810,3679.94) 3925.06,3795 P2.1
MCU_MOSI: P2.4 U1.11 U7.1 Z2.1 | length 2960.4
  Top Layer w10: v1(3550,3720) U1.11 ; v1(3810,3720) 3942.52,3587.48 U7.1
  Bottom Layer w10: Z2.1 3020,2599.85 3020,2670.56 3154.44,2805 3260.8,2805 3470,3014.2 3470,3758.28 3561.72,3850 3930,3850 3935,3845 ; v1(3550,3720) v1(3810,3720) 3935,3845 ; P2.4 4115,3845 3935,3845
MCU_PA2: U7.35
MCU_PA3: U7.34
MCU_PA4: U7.33
MCU_PA5: U7.32
MCU_PA6: U7.31
MCU_PA7: U7.30
MCU_PB4: U7.44
MCU_PC0: U7.19
MCU_PC1: U7.20
MCU_PC2: U7.21
MCU_PC3: U7.22
MCU_PD2: U7.11
MCU_PD3: U7.12
MCU_PD4: U7.13
MCU_PD5: U7.14
MCU_RESET: C9.1 P2.5 R28.1 SW1.2 TP13.1 U7.4 | length 1255.4
  Top Layer w10: R28.1@3632.6,3228.54 3640,3235.95 TP13.1 3687.44,3335 3796.65,3444.21 SW1.2 ; C9.1 3807.56,3483.58 3822.04,3469.1 3836.18,3469.1 3846.93,3458.36 SW1.2 ; v1(3895,3487.44) 3897.23,3489.67 3905.47,3489.67 3906.56,3490.76 3926.55,3490.76 ; U7.4@3960.33,3490.76 3926.55,3490.76 ; SW1.2 3880,3444.21 3926.55,3490.76
  Bottom Layer w10: v1(3895,3487.44) 4145.73,3487.44 4219.65,3561.36 4219.65,3749.65 P2.5
MCU_UART_RX: P1.3 U7.9 Z1.5 | length 1159.7
  Top Layer w10: U7.9 3960.33,3333.28 3928.47,3333.28 3928.14,3332.95 3919.67,3332.95 3889.14,3302.43 3889.14,3211.72 3960,3140.86 P1.3 P1.3@3975,3034.09
  Bottom Layer w10: P1.3 3979.09,3049.09 4035,3105 4085,3105 4110,3080 4110,3010 4075,2975 4075,2580 Z1.5@4025,2530
MCU_UART_TX: P1.2 U7.10 Z1.6 | length 798.6
  Top Layer w10: U7.10 3919.02,3304.02 3909.14,3294.14 3909.14,3220 4050.61,3078.53 4050.61,3058.48 P1.2
  Bottom Layer w10: Z1.6@4025,2630 4025,3014.09 P1.2
MCU_XTAL_1: C11.2 U7.8 X2.1 | length 431.9
  Top Layer w10: C11.2 3802.56,3125.79 X2.1 3808.46,3135.63 3827.09,3154.25 3831.02,3154.25 3869.14,3192.37 3869.14,3327.01 3909.14,3367.01 U7.8
MCU_XTAL_2: C12.2 U7.7 X2.3 | length 364.9
  Top Layer w10: X2.3 3747.44,3224.21 C12.2 3747.44,3342.44 3765,3360 3871.93,3360 3910.43,3398.5 U7.7
MUX_A_0: U4.10 U5.15 | length 1143.9
  Top Layer w10: U4.10 v1(4694.45,2560.55) v1@4693.9,2560 ; U5.15 4618.82,3405 v1(4700,3405)
  Bottom Layer w10: v1(4694.45,2560.55) 4689.26,2560.55 4689.12,2560.69 4835,2706.57 4835,3270 v1(4700,3405)
MUX_A_1: U4.11 U5.1 | length 1381.4
  Top Layer w10: U4.11 4600.79,2534.17 4685.83,2534.17 4700,2520 v1(4695,2520) ; U5.1@4839.49,3383.15 U5.1 4872.64,3350 v1(4922.93,3350)
  Bottom Layer w10: v1(4695,2520) 4734.17,2559.17 4734.17,2577.46 4855,2698.28 4855,3401.52 4909.3,3455.83 4934.17,3455.83 4950,3440 4950,3385 4922.93,3357.93 v1(4922.93,3350)
MUX_A_2: U4.14 U5.2 | length 1066.8
  Top Layer w10: v1(4760,2560.55) 4781.52,2560.55 ; 4781.52,2560 4806.56,2534.96 U4.14 ; U5.2 4893.98,3406.02 v1(4895,3405)
  Bottom Layer w10: v1(4760,2560.55) 4765.13,2560.55 4875,2670.42 4875,3385 v1(4895,3405)
MUX_A_3: U4.13 U5.3 | length 1171.6
  Top Layer w10: v1(4760,2520) 4783.15,2520 4791.19,2511.96 4857.25,2511.96 U4.13 ; U5.3@4840.32,3433.5 U5.3 4918.39,3431.61 v1(4920,3430)
  Bottom Layer w10: v1(4760,2520) 4770,2520 4895,2645 4895,3365 4925,3395 4925,3421.85 4920,3426.85 v1(4920,3430)
MUX_A_SENSE: TP6.1 U3.3 U4.1 | length 1675
  Top Layer w10: U4.1 4612.86,2790.87 4615.86,2793.87 4615.86,2806.72 4630,2820.87 v1(4630,2855) ; U3.3 v1(4693.9,3760) 4693.9,3763.15 4700,3769.26 4700,3770 4798.74,3868.74 4798.74,3877.88 4870.86,3950 5005,3950 5032.99,3922.01 5032.99,3855.99 TP6.1
  Bottom Layer w10: v1(4630,2855) 4630,3696.1 v1(4693.9,3760)
MUX_B_0: U5.4 U6.10 | length 412.4
  Top Layer w10: U5.4 4812.2,3457.2 4790.59,3435.59 4790.59,3353.98 4909.14,3235.42 4909.14,3210.56 4897.34,3198.76 4897.34,3177.89 4890.91,3171.46 U6.10
MUX_B_1: U5.5 U6.11 | length 392.8
  Top Layer w10: U5.5 4809.17,3482.8 4770.59,3444.21 4770.59,3250.39 4822.34,3198.64 4858.25,3198.64 U6.11
MUX_B_2: U5.6 U6.14 | length 489.2
  Top Layer w10: U6.14 4696.59,3197.05 4750.59,3251.05 4750.59,3452.5 4806.48,3508.39 U5.6
MUX_B_3: U5.7 U6.13 | length 489.2
  Top Layer w10: U6.13 4693.9,3222.64 4730.59,3259.33 4730.59,3460.78 4803.58,3533.77 4842,3533.77 U5.7
MUX_B_SENSE: TP7.1 U3.5 U6.1 | length 1221.1
  Top Layer w10: v1(4660,3000) 4718.86,2941.14 U6.1 ; v1@4780,3710 U3.5 4890,3710 TP7.1
  Bottom Layer w10: v1(4660,3000) 4650,3010 4650,3583.08 v1(4776.92,3710)
MUX_B_UNUSED1: U6.22
MUX_B_UNUSED2: U6.21
MUX_B_UNUSED3: U6.20
MUX_B_UNUSED4: U6.19
MUX_B_UNUSED5: U6.18
MUX_B_UNUSED6: U6.17
MUX_B_UNUSED7: U6.16
MUX_BRAKE_OVERTRAVEL: D25.2 R27.2 U6.23 | length 734.2
  Top Layer w10: U6.23 4664.98,2966.73 4710.57,2921.14 4790.59,2921.14 4811.73,2900 4865.24,2900 4990.24,2775 5107.01,2775 5143.31,2738.7 5144.29,2738.7 5157.01,2725.98 D25.2
  Top Layer w40: D25.2 R27.2
MUX_BRK_PRS_IN: D15.2 R31.2 U4.18 | length 420.8
  Top Layer w10: U4.18 4952.68,2637.32 5015,2575 5107.01,2575 5143.31,2538.7 5144.29,2538.7 5157.01,2525.98 D15.2
  Top Layer w40: D15.2 R31.2
MUX_BSPD_TEST: D16.2 R32.2 U4.17 | length 490.7
  Top Layer w10: U4.17 4945,2611.73 4995,2561.73 4995,2495 5015,2475 5107.01,2475 5143.31,2438.7 5144.29,2438.7 5157.01,2425.98 D16.2
  Top Layer w40: D16.2 R32.2
MUX_DASH_INERTIA: D24.2 R26.2 U6.2 | length 432.9
  Top Layer w10: U6.2 4861.57,2965 4919.96,2965 5009.96,2875 5107.01,2875 5143.31,2838.7 5144.29,2838.7 5157.01,2825.98 D24.2
  Top Layer w40: D24.2 R26.2
MUX_ESTOP_DASH: D23.2 R25.2 U6.3 | length 402.1
  Top Layer w10: U6.3 4928.23,2992.32 4946.1,2974.45 5107.56,2974.45 5143.31,2938.7 5144.29,2938.7 5157.01,2925.98 D23.2
  Top Layer w40: D23.2 R25.2
MUX_ESTOP_LEFT: D21.2 R23.2 U6.5 | length 474.1
  Top Layer w10: U6.5 4925.62,3043.5 4997.34,3115.22 4997.34,3157.34 5015,3175 5107.01,3175 5143.31,3138.7 5144.29,3138.7 5157.01,3125.98 D21.2
  Top Layer w40: D21.2 R23.2
MUX_ESTOP_RIGHT: D22.2 R24.2 U6.4 | length 418.6
  Top Layer w10: U6.4 4928.32,3017.91 4985.4,3075 5107.01,3075 5143.31,3038.7 5144.29,3038.7 5157.01,3025.98 D22.2
  Top Layer w40: D22.2 R24.2
MUX_INPUT_BMS: D4.2 R8.2 U4.7 | length 3197.6
  Top Layer w10: v1(2710.83,3575) 2725,3575 2761.5,3611.5 R8.2 ; v1(4480,2620) 4483.1,2623.1 4524.46,2623.1 4538.69,2637.32 U4.7
  Top Layer w40: R8.2 D4.2
  Bottom Layer w10: v1(2710.83,3575) 2710.83,3342.54 2695,3326.72 2695,2771.57 2755,2711.57 2755,2541.57 2866.57,2430 4290,2430 v1(4480,2620)
MUX_INPUT_BSPD: D6.2 R10.2 U4.5 | length 3355.9
  Top Layer w10: v1(2760,3779.17) 2790,3809.17 2790,3825 ; v1(4426.52,2688.5) U4.5
  Top Layer w40: R10.2 2790,3825 D6.2
  Bottom Layer w10: v1(2760,3779.17) 2760,3686.52 2760.83,3685.7 2760.83,3335.97 2735,3310.15 2735,2789.11 2789.63,2734.48 2789.63,2733.51 2795,2728.14 2795,2558.14 2883.14,2470 4263.28,2470 4424.17,2630.89 4424.17,2686.16 v1(4426.52,2688.5)
MUX_INPUT_HVD: D2.2 R6.2 U4.9 | length 3100.6
  Top Layer w10: v1(2655,3375) 2711.5,3375 R6.2 ; v1(4477.99,2530) 4499.65,2530 4553.2,2583.55 4597.41,2583.55 U4.9
  Top Layer w40: R6.2 D2.2
  Bottom Layer w10: v1(2655,3375) 2655,2755 2715,2695 2715,2525 2850,2390 4337.99,2390 v1(4477.99,2530)
MUX_INPUT_IMD: D3.2 R7.2 U4.8 | length 3143.9
  Top Layer w10: v1(2685,3475) 2711.5,3475 R7.2 ; v1(4477.99,2575) 4504.65,2575 4529.65,2600 4541.38,2611.73 U4.8
  Top Layer w40: R7.2 D3.2
  Bottom Layer w10: v1(2685,3475) 2685,3345 2675,3335 2675,2763.28 2735,2703.28 2735,2533.28 2858.28,2410 4312.99,2410 v1(4477.99,2575)
MUX_INPUT_PDOC: D5.2 R9.2 U4.6 | length 3276.9
  Top Layer w10: v1(2735,3675) 2773.25,3713.25 R9.2 ; v1(4450,2655) 4523.7,2655 4531.57,2662.91 U4.6
  Top Layer w40: R9.2 D5.2
  Bottom Layer w10: v1(2735,3675) 2735,3587.35 2736.65,3585.7 2736.65,3340.09 2715,3318.43 2715,2779.85 2775,2719.85 2775,2549.85 2874.85,2450 4271.57,2450 4450,2628.43 v1(4450,2655)
MUX_INPUT_SDC: D7.2 R11.2 U4.4 | length 3451.7
  Top Layer w10: v1(2815,3875) 2815,3925 ; v1(4395,2720) 4516.62,2720 4522.53,2714.09 U4.4
  Top Layer w40: R11.2 2815,3925 D7.2
  Bottom Layer w10: v1(2815,3875) 2815,3345 2755,3285 2755,2797.4 2815,2737.4 2815,2566.42 2891.42,2490 4255,2490 4395,2630 v1(4395,2720)
MUX_LEM_IN: D14.2 R18.2 U4.19 | length 400
  Top Layer w10: U4.19 4955,2662.91 4967.09,2675 5107.01,2675 5143.31,2638.7 5144.29,2638.7 5157.01,2625.98 D14.2
  Top Layer w40: D14.2 R18.2
MUX_SENSE_BMS: D10.2 R14.2 U4.23 | length 2292.4
  Top Layer w10: D10.2 2887.83,2975 v1(3001.97,2975) ; v1(3330,2950) 3355,2925 3486.57,2925 3611.57,2800 4505,2800 v1(4565,2860) ; v1(4790.59,2780) 4802.72,2767.87 4857.25,2767.87 U4.23
  Top Layer w40: R14.2 D10.2
  Bottom Layer w10: v1(3001.97,2975) 3010.96,2983.99 3296.01,2983.99 v1(3330,2950) ; v1(4565,2860) 4565,2830 4629.17,2765.83 4729.71,2765.83 4743.89,2780 v1(4790.59,2780)
MUX_SENSE_BSPD: D12.2 R16.2 U4.21 | length 2385.5
  Top Layer w10: D12.2 2887.83,3175 v1(3000,3175) ; v1(3385,3000) 3420,2965 3503.14,2965 3628.14,2840 4455,2840 v1(4475,2860) ; v1(4765.13,2698.28) 4783.28,2698.28 4799.09,2714.09 U4.21
  Top Layer w40: R16.2 D12.2
  Bottom Layer w10: v1(3000,3175) 3030,3145 3030,3075 3081.01,3023.99 3361.01,3023.99 v1(3385,3000) ; v1(4475,2860) 4475,2851.72 4608.02,2718.7 4608.76,2718.7 4629.17,2698.28 v1(4765.13,2698.28)
MUX_SENSE_HVD: D8.2 R12.2 U4.3 | length 1953.9
  Top Layer w10: D8.2 2837.83,2824.02 2850.55,2811.3 2851.54,2811.3 2872.83,2790 2985,2790 v1(3020,2825) ; v1(3266.21,2885) 3470,2885 3595,2760 4518.7,2760 4540,2738.7 4599.02,2738.7 U4.3
  Top Layer w40: R12.2 D8.2
  Bottom Layer w10: v1(3020,2825) 3040,2845 3226.21,2845 v1(3266.21,2885)
MUX_SENSE_IMD: D9.2 R13.2 U4.2 | length 1950.5
  Top Layer w10: D9.2 2887.83,2875 v1(3001.97,2875) ; v1(3300,2920) 3315,2905 3478.28,2905 3603.28,2780 4530,2780 4545,2765 4599.72,2765 U4.2
  Top Layer w40: R13.2 D9.2
  Bottom Layer w10: v1(3001.97,2875) 3035,2875 3045,2865 3200,2865 3255,2920 v1(3300,2920)
MUX_SENSE_PDOC: D11.2 R15.2 U4.22 | length 2306.7
  Top Layer w10: D11.2 2887.83,3075 v1(3000,3075) ; v1(3360,2975) 3390,2945 3494.85,2945 3619.85,2820 4480,2820 v1(4520,2860) ; v1(4757.48,2738.7) 4758.46,2739.69 4784.07,2739.69 4784.3,2739.45 4805.7,2739.45 4805.93,2739.69 U4.22
  Top Layer w40: R15.2 D11.2
  Bottom Layer w10: v1(3000,3075) 3071.01,3003.99 3331.01,3003.99 v1(3360,2975) ; v1(4520,2860) 4520,2835 4616.3,2738.7 v1(4757.48,2738.7)
MUX_SENSE_SDC: D13.2 R17.2 U4.20 | length 2473.3
  Top Layer w10: D13.2 2837.83,3324.02 2850.55,3311.3 2851.54,3311.3 2887.83,3275 v1(3000,3275) ; v1(3410,3025) 3450,2985 3511.42,2985 3636.42,2860 4415,2860 v1(4425,2870) ; v1(4740,2665) 4781.5,2665 4805,2688.5 U4.20
  Top Layer w40: R17.2 D13.2
  Bottom Layer w10: v1(3000,3275) 3050,3225 3050,3083.28 3089.29,3043.99 3391.01,3043.99 v1(3410,3025) ; v1(4425,2870) 4630,2665 v1(4740,2665)
MUX_SHIFT_CLK: TP12.1 U5.11 U7.26 Z1.4 | length 2058.3
  Top Layer w10: v1(4250,3419.65) 4294.06,3419.65 4346.69,3367.01 U7.26 4507.72,3367.01 4523.66,3382.95 4523.66,3468.89 4560.44,3505.67 4615.08,3505.67 U5.11 4653.74,3508.39 4669.17,3523.82 4669.17,3531.1 4698.9,3560.83 4735.34,3560.83 4804.51,3630 5043.98,3630 TP12.1
  Bottom Layer w10: Z1.4@3935,2640 3885,2690 3885,3151.42 4133.58,3400 4210.86,3400 4230.51,3419.65 v1(4250,3419.65)
MUX_SHIFT_DATA: TP10.1 U5.14 U7.24 Z1.2 | length 2631.3
  Top Layer w10: v1(4255,3342.44) 4294.57,3342.44 4332.99,3304.02 U7.24 4539.02,3304.02 4563.66,3328.66 4563.66,3407.55 4585.01,3428.9 4615.08,3428.9 U5.14 4620.51,3434.33 4675.86,3434.33 4748.47,3506.94 4748.47,3517.39 4821.08,3590 5265,3590 5290,3615 5290,3735 5236.52,3788.48 5216.52,3788.48 TP10.1
  Bottom Layer w10: Z1.2 3865,2689.85 3865,3159.71 4125.31,3420.02 4200.02,3420.02 4230,3450 4265,3450 4280,3435 4280,3370 4252.44,3342.44 v1(4255,3342.44)
MUX_SHIFT_LATCH: TP11.1 U5.12 U7.25 Z1.3 | length 2294
  Top Layer w10: v1(4240,3380) 4291.57,3380 4336.06,3335.51 U7.25 4408.57,3336.64 4521.64,3336.64 4543.66,3358.66 4543.66,3460.6 4565.85,3482.8 U5.12 4656.43,3482.8 4689.17,3515.54 4689.17,3522.82 4707.18,3540.83 4743.62,3540.83 4812.8,3610 5140,3610 TP11.1
  Bottom Layer w10: Z1.3@3925,2530 3930,2530 3975,2575 3975,2682.43 3905,2752.43 3905,3143.14 4141.86,3380 v1(4240,3380)
MUX_SHIFT_OUT: U5.9
MUX_SHIFT_RESET: TP9.1 U5.10 U7.23 Z1.1 | length 2430.5
  Top Layer w10: v1(4285,3310) 4322.48,3272.52 U7.23 v1(4515.71,3272.52) ; v1(4548.98,3533.98) U5.10 4643.76,3533.98 4690.61,3580.83 4727.06,3580.83 4796.23,3650 4945,3650 TP9.1
  Bottom Layer w10: Z1.1@3825,2530 3770,2585 3770,2675 3845,2750 3845,3167.99 4117.02,3440.02 4191.73,3440.02 4221.72,3470 4273.28,3470 4300,3443.28 4300,3328.86 4285,3313.86 v1(4285,3310) ; v1(4515.71,3272.52) 4515.71,3490.71 4548.98,3523.98 v1(4548.98,3533.98)
MUX_UPRIGHT_BL: D19.2 R21.2 U6.7 | length 619.8
  Top Layer w10: U6.7 4920.24,3094.69 4957.34,3131.79 4957.34,3173.91 4975.55,3192.12 4975.55,3263.84 4995,3283.28 4995,3355 5015,3375 5107.01,3375 5143.31,3338.7 5144.29,3338.7 5157.01,3325.98 D19.2
  Top Layer w40: D19.2 R21.2
MUX_UPRIGHT_BR: D20.2 R22.2 U6.6 | length 546.9
  Top Layer w10: U6.6 4922.93,3069.09 4977.34,3123.51 4977.34,3165.63 4995.55,3183.84 4995.55,3255.55 5015,3275 5107.01,3275 5143.31,3238.7 5144.29,3238.7 5157.01,3225.98 D20.2
  Top Layer w40: D20.2 R22.2
MUX_UPRIGHT_FL: D17.2 R19.2 U6.9 | length 755
  Top Layer w10: U6.9 4909.14,3145.87 4917.34,3154.07 4917.34,3190.48 4935.55,3208.69 4935.55,3280.4 4955,3299.85 4955,3371.57 4975,3391.57 4975,3463.28 4995,3483.28 4995,3550 5015,3570 5112.01,3570 5143.31,3538.7 5144.29,3538.7 5157.01,3525.98 D17.2
  Top Layer w40: D17.2 R19.2
MUX_UPRIGHT_FR: D18.2 R20.2 U6.8 | length 691.2
  Top Layer w10: U6.8 4915.24,3120.28 4937.34,3142.38 4937.34,3182.2 4955.55,3200.4 4955.55,3272.12 4975,3291.57 4975,3363.28 4995,3383.28 4995,3455 5015,3475 5107.01,3475 5143.31,3438.7 5144.29,3438.7 5157.01,3425.98 D18.2
  Top Layer w40: D18.2 R20.2
NetP3_5: P3.5 R12.1 | length 93.5
  Top Layer w40: P3.5 R12.1
NetP3_6: P3.6 R13.1 | length 93.5
  Top Layer w40: P3.6 R13.1
NetP3_7: P3.7 R14.1 | length 93.5
  Top Layer w40: P3.7 R14.1
NetP3_8: P3.8 R15.1 | length 93.5
  Top Layer w40: P3.8 R15.1
NetP3_9: P3.9 R16.1 | length 93.5
  Top Layer w40: P3.9 R16.1
NetP3_10: P3.10 R17.1 | length 93.5
  Top Layer w40: P3.10 R17.1
NetP3_11: P3.11 R6.1 | length 93.5
  Top Layer w40: P3.11 R6.1
NetP3_12: P3.12 R7.1 | length 93.5
  Top Layer w40: P3.12 R7.1
NetP3_13: P3.13 R8.1 | length 93.5
  Top Layer w40: P3.13 R8.1
NetP3_14: P3.14 R9.1 | length 93.5
  Top Layer w40: P3.14 R9.1
NetP3_15: P3.15 R10.1 | length 93.5
  Top Layer w40: P3.15 R10.1
NetP3_16: P3.16 R11.1 | length 93.5
  Top Layer w40: P3.16 R11.1
NetP4_1: P4.1 R32.1 | length 98.5
  Top Layer w40: R32.1 P4.1
NetP4_2: P4.2 R31.1 | length 98.5
  Top Layer w40: R31.1 P4.2
NetP4_3: P4.3 R18.1 | length 98.5
  Top Layer w40: R18.1 P4.3
NetP4_4: P4.4 R27.1 | length 98.5
  Top Layer w40: R27.1 P4.4
NetP4_5: P4.5 R26.1 | length 95.3
  Top Layer w40: R26.1@5299.68,2825 P4.5
NetP4_6: P4.6 R25.1 | length 95.8
  Top Layer w40: R25.1@5299.22,2925 P4.6
NetP4_7: P4.7 R24.1 | length 96.2
  Top Layer w40: R24.1@5298.77,3025 P4.7
NetP4_8: P4.8 R23.1 | length 96.7
  Top Layer w40: R23.1@5298.31,3125 P4.8
NetP4_9: P4.9 R22.1 | length 97.1
  Top Layer w40: R22.1@5297.86,3225 P4.9
NetP4_10: P4.10 R21.1 | length 98.5
  Top Layer w40: R21.1 P4.10
NetP4_11: P4.11 R20.1 | length 98.7
  Top Layer w40: R20.1@5296.5,3424.55 5394.55,3424.55 P4.11
NetP4_12: P4.12 R19.1 | length 98.5
  Top Layer w40: R19.1 P4.12
SHDN_SENSE_A: TP5.1 U3.1 U3.2 U7.37 | length 1077.9
  Top Layer w10: U7.37 4247.99,3696.03 4291.96,3740 4498.98,3740 4568.98,3810 U3.2 4702.57,3810 4862.57,3970 5033.98,3970 TP5.1
  Top Layer w20: U3.2 U3.1
SHDN_SENSE_B: TP8.1 U3.6 U3.7 U7.36 | length 897.6
  Top Layer w10: U7.36 4279.49,3679.22 4285.16,3684.89 4285.16,3686.76 4318.4,3720 4553.48,3720 4574.58,3698.89 4574.58,3685.42 4590,3670 4660.07,3670 4750.07,3760 U3.6 ; U3.7 4854.02,3817.8 4882.8,3817.8 TP8.1
  Top Layer w20: U3.6 U3.7
pads on no net: P4.13 P4.14 U4.16 Z1.7 Z1.8 Z1.9 Z2.9

## Polygon pours and split planes (outlines as drawn)
GND on Bottom Layer "Bottom Layer-GND" (solid, pour order 2): 2555.81,3980 2560.81,3975 5440.81,3975 5440.81,2380 2555.81,2380
+5 on Top Layer "Top Layer-+5" (solid, pour order 0): 2555,3980 2560,3975 5440,3975 5440,2380 2555,2380

## Silkscreen, mask and mechanical layers (free items; w line width, h text height)
Top Overlay:
  lines w6: 4130,2980 4190,2980 ; 4140,2965.59 4180,2965.59 ; 4148.5,2950 4170,2950
  text "CAN TX" at 3025,3920 h40
  text "CAN RX" at 3025,3725 h40
  text "LED" at 4520,2985 h40 r90
  text "RX" at 3925,2940 h40
  text "TX" at 4025,2940 h40
  text "A" at 4245,2925 h40
  text "B" at 4425,2925 h40
  text "CAN" at 3345,2805 h60
  text "SHIFT_REG" at 3770,2805 h60
Bottom Overlay:
  drawing of 25 lines, arcs and shapes, not listed